# Altium PCB pcb.pcbdoc
Units mil, origin at the board's own origin, x right, y up, seen from the top; angles counter-clockwise.
Board outline 1968.5 x 1259.84 mil, 2 copper layers (Top Layer, Bottom Layer); 54 components, 43 nets, 242 pads, 29 vias.
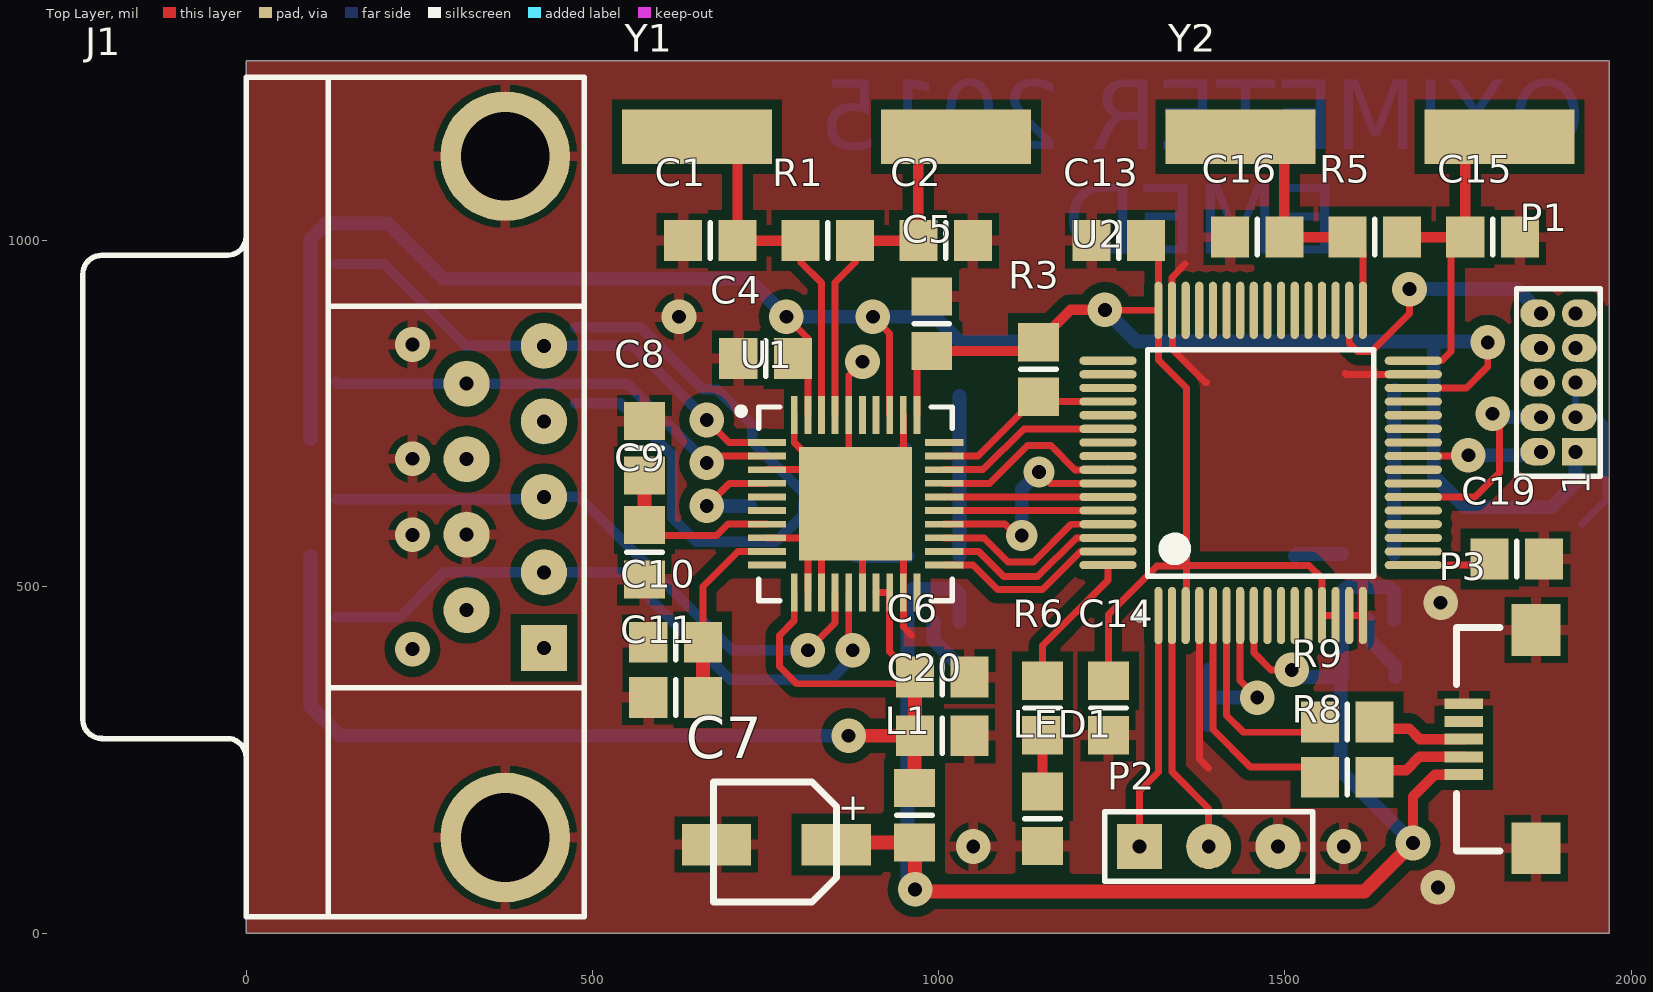
[diagram p0: Top Layer view]
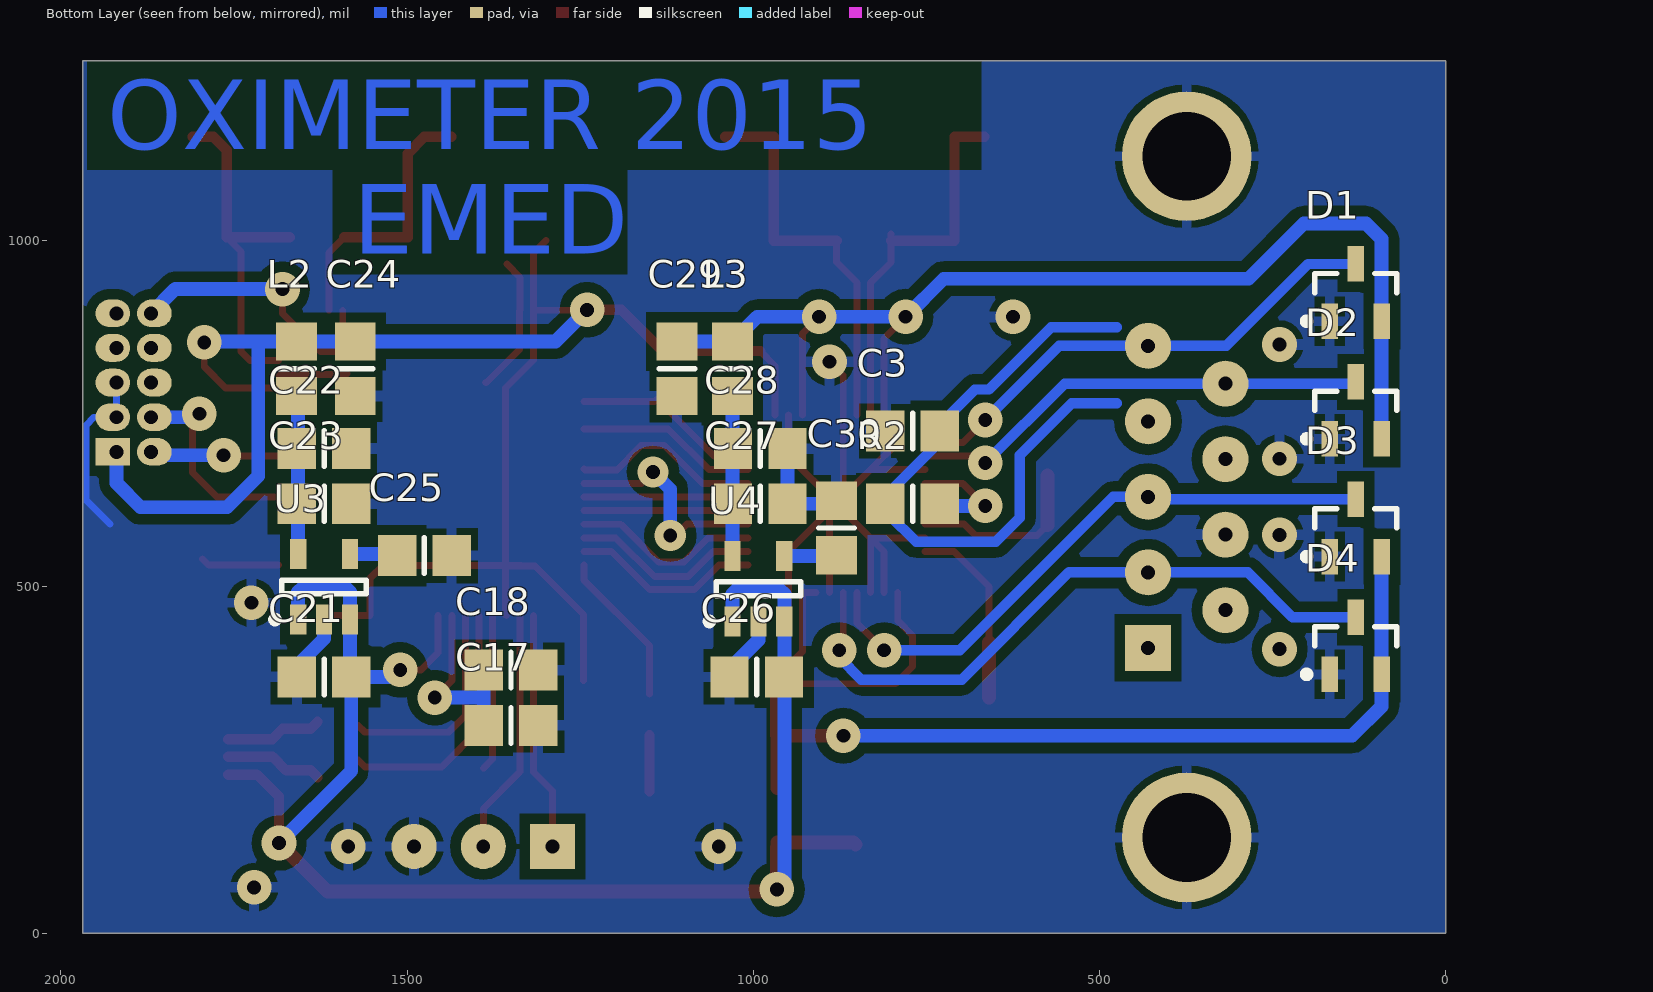
[diagram p1: Bottom Layer view, seen from below]

## Layer stack, top to bottom
Top Solder: solder mask 0.4, Solder Resist, Dk 3.5
Top Layer: signal copper 1.4
Dielectric 1: dielectric 12.6, FR-4, Dk 4.8
Bottom Layer: signal copper 1.4
Bottom Solder: solder mask 0.4, Solder Resist, Dk 3.5

## Board outline
0,0 1968.5,0 1968.5,1259.84 0,1259.84

## Design rules (kind name [scope] priority, off if disabled: settings)
Clearance Clearance_Poly [InPoly] p1: gap=15
Clearance [All] p2: gap=5
DiffPairsRouting [All] p1: maxlimit=10 minlimit=10 mostfreqgap=10 toplayer_minwidth=10 toplayer_maxwidth=15 toplayer_prefwidth=15 bottomlayer_minwidth=10 bottomlayer_maxwidth=15 bottomlayer_prefwidth=15 maxuncoupledlength=500
PolygonConnect [All] p1: connectstyle=Relief reliefconductorwidth=15 reliefentries=4 polygonreliefangle="90 Angle" airgapwidth=10
RoutingVias [All] p1: holewidth=28 width=50 viastyle="Through Hole" minholewidth=28 minwidth=50 maxholewidth=28 maxwidth=50
SolderMaskExpansion [All] p1: expansion=4
Width [All] p1: maxlimit=25 minlimit=10 preferedwidth=10
29 further rules are at their usual default settings.

## Classes and differential pairs
component class Power_module: C20 C21 C22 C23 C24 C25 C26 C27 C28 C29 C30 L1 L2 L3 U3 U4
component class Main: C7 P3
component class Control_module: C13 C14 C15 C16 C17 C18 C19 LED1 P1 P2 R5 R6 R8 R9 U2 Y2
component class Acquisition_module: C1 C2 C3 C4 C5 C6 C8 C9 C10 C11 D1 D2 D3 D4 J1 R1 R2 R3 U1 Y1
differential pair TX: +TX_P -TX_N
differential pair IN: +IN_P -IN_N
differential pair USB_C: +USB_C_P -USB_C_N

## Components (designator, comment, footprint, x,y, rotation, side; value= is the part's Value field where it differs from the comment)
C1 "Cap" 6-0805_M 670,1000 r0 top
C2 "Cap" 6-0805_M 1010,1000 r180 top
C3 "Cap" 6-0805_M 770,725 r180 bottom
C4 "Cap" 6-0805_M 750,830 r0 top
C5 "Cap" 6-0805_M 990,880 r270 top
C6 "Cap" 6-0805_M 1005,370 r180 top
C7 "Cap Pol1" "CAP SMD 4mm" 675,45 r270 top
C8 "Cap" 6-0805_M 575,700 r270 top
C9 "Cap" 6-0805_M 575,550 r90 top
C10 "Cap" 6-0805_M 620,420 r0 top
C11 "Cap" 6-0805_M 620,340 r0 top
C13 "Cap" 6-0805_M 1260,1000 r180 top
C14 "Cap" 6-0805_M 1245,325 r270 top
C15 "Cap" 6-0805_M 1800,1005 r180 top
C16 "Cap" 6-0805_M 1460,1005 r0 top
C17 "Cap" 6-0805_M 1350,300 r0 bottom
C18 "Cap" 6-0805_M 1350,380 r0 bottom
C19 "Cap" 6-0805_M 1835,540 r180 top
C20 "Cap" 6-0805_M 1005,285 r180 top
C21 "Cap" 6-0805_M 1620,370 r180 bottom
C22 "Cap" 6-0805_M 1620,700 r0 bottom
C23 "Cap" 6-0805_M 1620,620 r0 bottom
C24 "Cap" 6-0805_M 1575,815 r90 bottom
C25 "Cap" 6-0805_M 1475,545 r0 bottom
C26 "Cap" 6-0805_M 995,370 r180 bottom
C27 "Cap" 6-0805_M 990,620 r0 bottom
C28 "Cap" 6-0805_M 990,700 r0 bottom
C29 "Cap" 6-0805_M 1110,815 r90 bottom
C30 "Cap" 6-0805_M 880,585 r270 bottom
D1 "BAT54S" SOT23_N 130,925 r90 bottom
D2 "BAT54S" SOT23_N 130,755 r90 bottom
D3 "BAT54S" SOT23_N 130,585 r90 bottom
D4 "BAT54S" SOT23_N 130,415 r90 bottom
J1 "DB9" DB9 0,629.92 r90 top
L1 "Inductor" 6-0805_M 965,170 r90 top
L2 "Inductor" 6-0805_M 1660,815 r90 bottom
L3 "Inductor" 6-0805_M 1030,815 r90 bottom
LED1 "LED0" 6-0805_M 1150,165 r270 top
P1 "MHDR2X5" MHDR2X5 1920,695 r90 top
P2 "UART" HDR1X3 1290,125 r0 top
P3 "USB Header" MicroUSB-B 1850,280 r90 top
R1 "Res1" 6-0805_M 840,1000 r0 top
R2 "Res1" 6-0805_M 770,620 r180 bottom
R3 "Res1" 6-0805_M 1144,814 r90 top
R5 "Res1" 6-0805_M 1630,1005 r180 top
R6 "Res1" 6-0805_M 1150,325 r270 top
R8 "Res1" 6-0805_M 1590,225 r180 top
R9 "Res1" 6-0805_M 1590,305 r180 top
U1 "AFE4490" AFE4490QFN50P680X680X100_HS-41N 880,620 r0 top
U2 "MK22FN512" TQFP64_M 1465,679 r90 top
U3 "TPS73233" TI-DBV5_N 1620,500 r90 bottom
U4 "TPS73233" TI-DBV5_N 992.6,497.24 r90 bottom
Y1 "8MHz" "Crystal SMD" 1025,1150 r180 top
Y2 "8MHz" "Crystal SMD" 1810,1150 r180 top

## Footprints (in the part's own frame and the unit in brackets; to place one, negate y for a bottom-side part, rotate by r counter-clockwise, add the part's x,y. Pads: shape width x height; smd on the part's side, far side on the other; paste and mask are expansions set on the pad)
6-0805_M [mm] "Chip Resistor, Body 2.0x1.2mm, IPC Low Density"
  rect 1.4x1.5 smd: 1(-1,0) 2(1,0)
  silkscreen extent 0,-0.65 0,0.65, body extent -1.07,-0.7 1.07,0.7, height 0.7
AFE4490QFN50P680X680X100_HS-41N [mm] "Integrated Analog Front-End for Pulse Oximeters AFE4490 Footprint"
  rect 1.4x0.25 smd: 1(-3.25,2.25) 2(-3.25,1.75) 3(-3.25,1.25) 4(-3.25,0.75) 5(-3.25,0.25) 6(-3.25,-0.25) 7(-3.25,-0.75) 8(-3.25,-1.25) 9(-3.25,-1.75) 10(-3.25,-2.25) 21(3.25,-2.25) 22(3.25,-1.75) 23(3.25,-1.25) 24(3.25,-0.75) 25(3.25,-0.25) 26(3.25,0.25) 27(3.25,0.75) 28(3.25,1.25) 29(3.25,1.75) 30(3.25,2.25)
  rect 0.25x1.4 smd: 11(-2.25,-3.25) 12(-1.75,-3.25) 13(-1.25,-3.25) 14(-0.75,-3.25) 15(-0.25,-3.25) 16(0.25,-3.25) 17(0.75,-3.25) 18(1.25,-3.25) 19(1.75,-3.25) 20(2.25,-3.25) 31(2.25,3.25) 32(1.75,3.25) 33(1.25,3.25) 34(0.75,3.25) 35(0.25,3.25) 36(-0.25,3.25) 37(-0.75,3.25) 38(-1.25,3.25) 39(-1.75,3.25) 40(-2.25,3.25)
  rect 4.15x4.15 smd: 41(0,0)
  silkscreen extent -4.32,-3.55 3.55,3.55, body extent -3.4,-3.4 3.4,3.4, height 1
"CAP SMD 4mm" [mm]
  rect 1.524x2.54 smd: 1(-2.1,4.5) 2(-2.1,0.1)
  silkscreen extent -4.4,0 0,4.5, body extent -4.35,-0.04 -0.05,4.56, height 3.91
"Crystal SMD" [mm]
  rect 5.5x2 smd: 1(0,0) 2(9.5,0)
  body extent -1.65,-2.41 11.15,2.41, height 4.3
DB9 [mm] "DB9 Connector"
  rect 1.69x1.69 hole 0.508: 1(-5.54,-10.92)
  round 1.69 hole 0.508: 2(-2.77,-10.92) 3(0,-10.92) 4(2.77,-10.92) 5(5.54,-10.92) 6(-4.155,-8.08) 7(-1.385,-8.08) 8(1.385,-8.08) 9(4.155,-8.08)
  round 4.76 hole 3.26: 10(-12.495,-9.5) 11(12.495,-9.5)
  silkscreen extent -15.4,-12.4 15.4,6, body extent -15.4,-13.21 15.4,5.99, height 12.5
HDR1X3 [mil] "Connector; Header; 3 Position"
  rect 65x65 hole 20: 1(0,0)
  round 65 hole 20: 2(100,0) 3(200,0)
  silkscreen extent -50,-50 250,50
MHDR2X5 [mil] "Connector; Header; 5x2 Position"
  rect 40x50 hole 20 copper offset 0,-5: 1(0,0)
  oval 40x50 hole 20 copper offset 0,5: 2(0,50) 4(50,50) 6(100,50) 8(150,50) 10(200,50)
  oval 40x50 hole 20 copper offset 0,-5: 3(50,0) 5(100,0) 7(150,0) 9(200,0)
  silkscreen extent -35,-35 235,85
MicroUSB-B [mm] "Micro USB SMD Connector"
  rect 0.4x1.4 smd: D+(0,2.325) D-(-0.65,2.325) GND(1.3,2.325) ID(0.65,2.325) VCC(-1.3,2.325)
  rect 1.9x1.8 smd: M(-4,-0.325) M(4,-0.325)
  silkscreen extent -4.1,1 4.1,2.6, body extent -3.99,-2.87 3.99,2.55, height 2.63
SOT23_N [mm] "SOT23, 3-Leads, Body 2.9x1.3mm, Pitch 0.95mm, Lead Span 2.3mm, IPC Medium Density"
  rect 1.3x0.6 smd: 1(-1.05,0.95) 2(-1.05,-0.95) 3(1.05,0)
  silkscreen extent -1.17,-1.5 0.7,1.93, body extent -0.7,-1.5 0.7,1.5, height 1.1
TI-DBV5_N [mm] "SOT23, 5-Leads, Body 2.9x1.6mm, Pitch 0.95mm, IPC Medium Density"
  rect 1.1x0.6 smd: 1(-1.2,0.95) 2(-1.2,0) 3(-1.2,-0.95) 4(1.2,-0.95) 5(1.2,0.95)
  silkscreen extent -1.32,-1.55 0.25,1.93, body extent -0.87,-1.52 0.87,1.53, height 1.45
TQFP64_M [mm] "Thin QFP, 64-Leads, Body 10x10mm, Pitch 0.5mm, IPC Low Density"
  oval 2.1x0.3 smd: 1(-5.6,3.75) 2(-5.6,3.25) 3(-5.6,2.75) 4(-5.6,2.25) 5(-5.6,1.75) 6(-5.6,1.25) 7(-5.6,0.75) 8(-5.6,0.25) 9(-5.6,-0.25) 10(-5.6,-0.75) 11(-5.6,-1.25) 12(-5.6,-1.75) 13(-5.6,-2.25) 14(-5.6,-2.75) 15(-5.6,-3.25) 16(-5.6,-3.75) 33(5.6,-3.75) 34(5.6,-3.25) 35(5.6,-2.75) 36(5.6,-2.25) 37(5.6,-1.75) 38(5.6,-1.25) 39(5.6,-0.75) 40(5.6,-0.25) 41(5.6,0.25) 42(5.6,0.75) 43(5.6,1.25) 44(5.6,1.75) 45(5.6,2.25) 46(5.6,2.75) 47(5.6,3.25) 48(5.6,3.75)
  oval 0.3x2.1 smd: 17(-3.75,-5.6) 18(-3.25,-5.6) 19(-2.75,-5.6) 20(-2.25,-5.6) 21(-1.75,-5.6) 22(-1.25,-5.6) 23(-0.75,-5.6) 24(-0.25,-5.6) 25(0.25,-5.6) 26(0.75,-5.6) 27(1.25,-5.6) 28(1.75,-5.6) 29(2.25,-5.6) 30(2.75,-5.6) 31(3.25,-5.6) 32(3.75,-5.6) 49(3.75,5.6) 50(3.25,5.6) 51(2.75,5.6) 52(2.25,5.6) 53(1.75,5.6) 54(1.25,5.6) 55(0.75,5.6) 56(0.25,5.6) 57(-0.25,5.6) 58(-0.75,5.6) 59(-1.25,5.6) 60(-1.75,5.6) 61(-2.25,5.6) 62(-2.75,5.6) 63(-3.25,5.6) 64(-3.75,5.6)
  silkscreen extent -5.72,-4.15 4.15,4.57, body extent -5,-5 5,5, height 1.2

## Part data
C1 C2 C3 C4 C5 C6 C8 C9 C10 C11 C13 C14 C15 C16 C17 C18 C19 C20 C21 C22 C23 C24 C25 C26 C27 C28 C29 C30: "Capacitor"
C7: "Polarized Capacitor (Radial)"
D1 D2 D3 D4: "Schottky Barrier Double Diode"
J1: library part "D Connector 9", "Receptacle Assembly, 9 Position, Right Angle"
LED1: "Typical INFRARED GaAs LED"
P1: "Header, 5-Pin, Dual row"
P2: library part "Header 3", "Header, 3-Pin"
P3: library part "USB 7 pin Header"
R1 R2 R3 R5 R6 R8 R9: "Resistor"
U1: "Integrated Analog Front-End for Pulse Oximeters"
U2: "120 MHz Cortex-M4 Based Microcontroller with FPU"
U3 U4: library part TPS73233DBVT, "Single Output Fast Transient Response LDO, 200 mA, Fixed 3.3 V Output, 1.7 to 5.5 V Input, with Reverse Current Protection, 5-pin SOT-23 (DBV), -40 to 85 degC, Green (RoHS & no Sb/Br)"
Y1 Y2: library part XTAL, "Crystal Oscillator"

## Via types
v1: diameter 50, hole 20, Top Layer to Bottom Layer, 27 vias
v2: diameter 45, hole 20, Top Layer to Bottom Layer, 2 vias

## Nets (pads, with @x,y where several pads share a name; then routed paths per layer and width w, separated by ;. In a path a pad name is that pad's centre, name@x,y a point inside that pad or via, vN(x,y) a via of type N, cw(c..) or ccw(c..) an arc to the next point about the centre after c; other vN are vias at no path point)
AFE_BG: C8.2 C9.2 U1.7 | length 261.5
  Top Layer w10: C9.2 590.37,574 679,574 695.47,590.47 U1.7
  Top Layer w20: C9.2 C8.2
AFE_TX_REF: C10.2 C11.2 U1.9 | length 274.1
  Top Layer w10: C10.2 659.37,500.37 710.1,551.1 U1.9
  Top Layer w20: C11.2 C10.2
AVDD: C4.2 C29.2 D1.2 D2.2 L3.2 U1.33 U1.39 | length 1693.3
  Top Layer w10: v1(780,890) 811.1,858.9 U1.39 ; v1(905,890) 929.21,865.79 U1.33
  Bottom Layer w20: D2.2 D1.2 92.6,1002.6 115,1025 205,1025 285,945 725,945 v1(780,890) v1(905,890) 994.37,890 L3.2 C29.2
DVDD: C5.2 C13.1 C14.1 C24.2 L2.2 P1.1 R3.2 U1.31 U2.3 U2.13 U2.14 U2.30 U2.48 | length 2762.6
  Top Layer w10: U1.31 968.58,819.21 C5.2 ; v1(1240,900) 1240.53,899.47 U2.48 ; C14.1 1245,460 1315,530 1334,530 ; C13.1 1317.36,982.01 U2.48 ; U2.3 1357.73,459.53 1357.73,530 1334,530 ; U2.14 U2.13 1553.58,512.42 1535,531 1357.73,531 ; U2.30 1762.27,787.27 1793,818 v1(1793,853) ; U2.48 1317.36,827.64 1357.73,787.27 1357.73,531 ; 1334,530 1335,531 1357.73,531
  Top Layer w15: C5.2 1131.26,840.63 R3.2 1190.63,900 v1(1240,900)
  Bottom Layer w20: v1(1240,900) 1285.63,854.37 C24.2 L2.2 1791.63,854.37 v1(1793,853) ; 1715,854.37 1715,660 1760,615 1885,615 1920,650 P1.1
GND: C1.1 C2.1 C3.1 C4.1 C5.1 C6.1 C7.2 C8.1 C9.1 C10.1 C11.1 C13.2 C14.2 C15.1 C16.1 C17.1 C18.1 C19.1 C20.1 C21.1 C22.1 C23.1 C24.1 C25.1 C26.1 C27.1 C28.1 C29.1 C30.1 D1.1 D2.1 D3.1 D4.1 J1.7 J1.10 J1.11 LED1.2 P1.3 P1.5 P2.3 P3.GND P3.M U1.3 U1.8 U1.12 U1.13 U1.16 U1.19 U1.32 U1.36 U1.40 U1.41 U2.4 U2.15 U2.16 U2.31 U2.47 U3.2 U4.2 | length 2408.7
  Top Layer w10: U1.8 U1.41@830.79,570.79 ; U1.3 U1.41@830.79,669.21 ; U1.40 791.42,708.58 U1.41@830.79,669.21 ; U1.12 811.1,551.1 U1.41@830.79,570.79 ; U1.13 U1.41@830.79,570.79 ; U1.16 U1.41@889.84,610.16 ; v1(890,825) 870.16,805.16 U1.36 U1.41@870.16,629.84 ; U1.32 948.9,688.9 U1.41 ; 961,430 948.9,442.1 U1.19 948.9,551.1 U1.41@889.84,610.16 ; 1356,966 1337.05,947.05 U2.47 1337.75,898.77 1337.75,842.72 1385.48,795 1387,795 ; U2.4 1376.42,251.58 1390,238 ; 1587,808 1588.05,806.95 U2.31 ; U2.15 U2.16 ; U1.41@830.79,570.79 U1.41 ; U1.41@830.79,669.21 U1.41@870.16,629.84 ; U1.41@870.16,629.84 U1.41 ; U1.41 U1.41@889.84,610.16
  Bottom Layer w10: P1.5 P1.3 1952,745 1964,733 1964,625.42 1929.13,590.55
  Bottom Layer w20: C30.1 884.37,620 C27.1 C28.1 ; U4.2 992.6,423.4 1034.37,381.63 C26.1 ; U3.2 1620,425 1659.37,385.63 C21.1
  other v1: 1721,66 1050,125 1585,125 1725,477 240,575 240,685 240,850 625,890
IN_N: D1.3 J1.5 U1.1 | length 728.8
  Top Layer w10: v1(665,741) 697.42,708.58 U1.1
  Bottom Layer w15: D1.3 198.66,966.34 316.97,848.03 J1.5 557.97,848.03 v1(665,741)
IN_P: D2.3 J1.9 U1.2 | length 674.8
  Top Layer w10: v1(665,679) 674.9,688.9 U1.2
  Bottom Layer w15: D2.3 132.83,793.5 J1.9 550.5,793.5 v1(665,679)
K22_AFE_RDY: U1.28 U2.54 | length 261
  Top Layer w10: U1.28 1064.21,669.21 1123.21,728.21 U2.54
K22_AFE_RESETZ: R3.1 U1.29 U2.52 | length 265.2
  Top Layer w10: U1.29 1056.9,688.9 R3.1@1135,767 ; R3.1@1140,770.63 1143.05,767.58 U2.52
K22_DIAG_END: U1.21 U2.63 | length 274
  Top Layer w10: U1.21 1049.58,531.42 1085,496 1150,496 1205.05,551.05 U2.63
K22_LED_ALM: U1.22 U2.62 | length 274.6
  Top Layer w10: U1.22 1057.9,551.1 1094,515 1143,515 1198.73,570.73 U2.62
K22_PD_ALM: U1.23 U2.61 | length 273.5
  Top Layer w10: U1.23 1065.21,570.79 1100,536 1137,536 1191.42,590.42 U2.61
K22_SPI_CE: U1.27 U2.57 | length 274.1
  Top Layer w10: U1.27 1073.53,649.53 1128,704 1162,704 1197,669 1243.37,669 U2.57@1244.53,670.16
K22_SPI_CLK: U1.24 U2.58 | length 366.6
  Top Layer w10: U1.24 1095.53,590.47 1112,574 v2(1120,574) 1122,576 1123,575 1124,576 v2@1125,575 ; v2@1149.53,650.47 1139,661 1144,666 v2(1145,666) 1161.53,649.47 U2.58
  Bottom Layer w20: v2(1120,574) 1120,641 v2(1145,666) v2@1136,666
K22_SPI_MISO: U1.25 U2.60 | length 226.6
  Top Layer w10: U1.25@1017.95,610.16 1244.47,610.16 U2.60
K22_SPI_MOSI: U1.26 U2.59 | length 226.6
  Top Layer w10: U1.26 U1.26@1008.01,629.79 ; U1.26@1018.01,629.79 U2.59
LVDD: C6.2 C20.2 D3.2 D4.2 L1.2 U1.11 U1.17 U1.18 | length 1726.5
  Top Layer w10: U1.11 791.42,451.42 770,430 770,385 795,360 C6.2@965.63,360 ; U1.17 U1.18 929.21,406.42 C6.2
  Top Layer w20: v1(870,285) C20.2@955.63,285 ; L1.2 965,285 965.63,285.63 C6.2@965.63,350 ; C6.2@965.63,360 C6.2
  Bottom Layer w20: D3.2 D4.2 92.6,327.4 135,285 v1(870,285)
NetC1_2: C1.2 R1.1 U1.38 Y1.2 | length 558.3
  Top Layer w10: R1.1@801.26,1010 801.26,968.74 830.79,939.21 U1.38
  Top Layer w15: Y1.2@666.61,1150 709.37,1150 C1.2 R1.1
NetC2_2: C2.2 R1.2 U1.37 Y1.1 | length 575.5
  Top Layer w10: U1.37 850.47,939.53 880,969.06 R1.2@880,1000
  Top Layer w15: R1.2 880,1000 C2.2 970.63,1150 Y1.1@1040.63,1150
NetC15_2: C15.2 R5.1 U2.32 Y2.1 | length 507.9
  Top Layer w10: U2.32 1726.64,826.64 1740,840 1740,984.37 C15.2
  Top Layer w15: R5.1 C15.2 1760.63,1130.63 1780,1150 Y2.1
NetC16_2: C16.2 R5.2 U2.33 Y2.2 | length 400
  Top Layer w10: R5.2 1612.64,982.99 U2.33
  Top Layer w15: Y2.2 1475,1150 1499.37,1125.63 C16.2 R5.2
NetC17_2: C17.2 C18.2 U2.7 | length 279.3
  Top Layer w10: U2.7 1435.47,364.53 v1(1460,340)
  Bottom Layer w20: C17.2 1389.37,340 ; C18.2 1389.37,340 ; v1(1460,340) 1389.37,340
NetC19_2: C19.2 U2.17 | length 113.7
  Top Layer w10: U2.17 1786.99,531.36 C19.2
NetC22_2: C22.2 C23.2 L2.1 U3.5 | length 238.6
  Bottom Layer w20: U3.5 1657.4,783.03 L2.1@1659.37,785
NetC25_2: C25.2 U3.4 | length 69.2
  Bottom Layer w20: C25.2 1516.61,547.24 U3.4
NetC27_2: C27.2 C28.2 L3.1 U4.5 | length 231.1
  Bottom Layer w20: U4.5 L3.1
NetC30_2: C30.2 U4.4 | length 75.7
  Bottom Layer w20: C30.2 881.14,544.49 U4.4
NetLED1_1: LED1.1 R6.2 | length 81.3
  Top Layer w15: LED1.1 R6.2
NetP2_1: P2.1 U2.1 | length 339.9
  Top Layer w10: P2.1@1290,130 1290,205 1317.36,232.36 U2.1
NetP2_2: P2.2 U2.2 | length 350.5
  Top Layer w10: U2.2 1337.05,232.95 1390,180 P2.2@1390,130
NetR2_2: R2.2 U1.4 | length 163.2
  Top Layer w10: v1(665,617) 697.53,649.53 U1.4
  Bottom Layer w20: v1(665,617) R2.2@727.63,617
NetR6_1: R6.1 U2.64 | length 225.5
  Top Layer w10: R6.1@1150,345 1150,415 1244.53,509.53 U2.64
NetR8_2: R8.2 U2.5 | length 365.6
  Top Layer w10: U2.5 1396.1,293.9 1450,240 1560.63,240 R8.2@1570.63,250
NetR9_2: R9.2 U2.6 | length 313.3
  Top Layer w10: U2.6 1415.79,314.21 1440,290 1560.63,290 R9.2@1570.63,300
SWD_CLK: P1.4 U2.22 | length 300.3
  Top Layer w10: U2.22 1774.79,629.79 1810,665 1810,740 v1(1800,750)
  Bottom Layer w20: v1(1800,750) 1805,745 P1.4
SWD_DIO: P1.2 U2.25 | length 187.1
  Top Layer w10: U2.25 1763.84,688.84 v1(1765,690)
  Bottom Layer w20: v1(1765,690) 1865,690 P1.2
SWD_RST: P1.10 U2.34 | length 401.7
  Top Layer w10: U2.34 1592.95,852.05 1605,840 1625,840 1680,895 v1(1680,930)
  Bottom Layer w20: v1(1680,930) 1835,930 P1.10
TX_N: D3.3 J1.3 U1.14 | length 874.2
  Top Layer w10: v1(811.02,408.46) 850.47,447.91 U1.14
  Bottom Layer w15: D3.3 426.34,626.34 J1.3 480.08,629.92 701.54,408.46 v1(811.02,408.46)
TX_P: D4.3 J1.2 U1.15 | length 946.6
  Top Layer w10: U1.15 870.16,414.29 v1(875.98,408.46)
  Bottom Layer w15: D4.3 221.34,456.34 285.87,520.87 J1.2 544.13,520.87 699,366 844,366 875.98,397.98 v1(875.98,408.46)
USB_C_N: P3.D- R8.1 | length 141.3
  Top Layer w15: R8.1 1639.37,235 1675,235 1694.41,254.41 P3.D-
USB_C_P: P3.D+ R9.1 | length 139.4
  Top Layer w15: R9.1 1639.37,295 1680,295 1695,280 P3.D+
VBUS: C7.1 C21.2 C26.2 L1.1 P3.VCC U2.8 U3.1 U3.3 U4.1 U4.3 | length 2359.3
  Top Layer w10: U2.8 1455.16,404.84 1480,380 v1(1510,380)
  Top Layer w15: v1(1685,130) 1685,197 1716.82,228.82 P3.VCC
  Top Layer w20: C7.1 855.12,130.63 L1.1 965,125 966,124 v1(966,63) 966,61 967,60 1615,60 v1(1685,130)
  Bottom Layer w20: v1(966,63) 955.2,73.8 U4.3 955.2,489.84 962.6,497.24 1022.6,497.24 1030,489.84 U4.1 ; v1(1510,380) 1520,370 C21.2 ; U3.1 1657.4,492.6 1650,500 1590,500 1582.6,492.6 U3.3 1582.6,371.97 C21.2 ; v1(1685,130) 1580.63,234.37 C21.2
VCM_SHIELD: C3.2 R2.1 | length 957.7
  Bottom Layer w15: 475,765 540,765 615,690 615,600 650,565 765,565 804.37,604.37 R2.1@804.37,620 ; 475,875 570,875 660,785 680,785 730.63,734.37 C3.2 730.63,709.37 809.37,630.63 R2.1
pads on no net: J1.1 J1.4 J1.6 J1.8 P1.6 P1.7 P1.8 P1.9 P3.ID U1.5 U1.6 U1.10 U1.20 U1.30 U1.34 U1.35 U2.9 U2.10 U2.11 U2.12 U2.18 U2.19 U2.20 U2.21 U2.23 U2.24 U2.26 U2.27 U2.28 U2.29 U2.35 U2.36 U2.37 U2.38 U2.39 U2.40 U2.41 U2.42 U2.43 U2.44 U2.45 U2.46 U2.49 U2.50 U2.51 U2.53 U2.55 U2.56
copper on no net:
  other v1: 240,410

## Polygon pours and split planes (outlines as drawn)
GND on Bottom Layer "Bottom Layer-No Net" (solid, remove dead copper, pour order 4): 0,1259.84 1968.5,1259.84 1968.5,0 0,0
GND on Top Layer "Bottom Layer-No Net" (solid, remove dead copper, pour order 3): 0,1259.84 1968.5,1259.84 1968.5,0 0,0

## Other copper
Bottom Layer:
  text "OXIMETER 2015" at 1933,1132 h100
  text "EMED" at 1578,981 h100

## Text inside footprints (layer, text, board x,y; h text height)
C7: Top Overlay "+" at 860.04,202.48 h39.37 r270
P1: Top Overlay "1" at 1940,632.01 h40 r90
P3: Mechanical 18 "PCB EDGE" at 1960.24,157.95 h40 r90